# EAGLE board CT_schematic (EAGLE 7.6.0)

Size 100 x 80 mm. Coordinates in mm from the lower left corner, seen from the top.
Outline: 0,0 100,0 100,80 0,80 0,0
Copper layers (1*16): Top 0.035mm / dielectric 1.5mm / Bottom 0.035mm
Design rules "default": minimum track width 10mil, minimum drill 24mil, track to track 8mil, track to pad 8mil, pad to pad 8mil, via to via 8mil, smd to smd 8mil, copper to edge 40mil, drill to drill 8mil, minimum pad ring 10mil, minimum via ring 8mil, stop-mask expansion 4mil, vias tented up to drill 0mil, thermal gap 10mil

## Footprints (pad centres in the part's own frame; a part is rotated, then mirrored left to right if it is on the bottom)
C0603 = smd 0.8 x 0.8: 1 -0.762,0; 2 0.762,0
C0402 = smd 0.5 x 0.5: 1 -0.508,0; 2 0.508,0
C0805 = smd 1.2 x 1.3: 1 -1.016,0; 2 1.016,0
C1206 = smd 1.3 x 1.6: 1 -1.524,0; 2 1.524,0
2220 = smd 1.85 x 5.5: 1 -2.55,0; 2 2.55,0
R0603 = smd 0.8 x 0.8: 1 -0.762,0; 2 0.762,0
EXV-9H = smd 3.505 x 1.676: 1 -2.857,0; 2 2.857,0
L0603 = smd 0.8 x 0.8: 1 -0.762,0; 2 0.762,0
DR1040 = smd 1.6 x 3.2: 1 -4.458,0; 2 4.458,0
PJ-037B_PACKAGE = drill 3.7 square: 1 12,0 | drill 3.2 square: 2 6,0
LQFP176 = smd 0.3 x 1.2: 1 -10.75,-12.75; 2 -10.25,-12.75; 3 -9.75,-12.75; 4 -9.25,-12.75; 5 -8.75,-12.75; 6 -8.25,-12.75; 7 -7.75,-12.75; 8 -7.25,-12.75; 9 -6.75,-12.75; 10 -6.25,-12.75; 11 -5.75,-12.75; 12 -5.25,-12.75; 13 -4.75,-12.75; 14 -4.25,-12.75; 15 -3.75,-12.75; 16 -3.25,-12.75; 17 -2.75,-12.75; 18 -2.25,-12.75; 19 -1.75,-12.75; 20 -1.25,-12.75; 21 -0.75,-12.75; 22 -0.25,-12.75; 23 0.25,-12.75; 24 0.75,-12.75; 25 1.25,-12.75; 26 1.75,-12.75; 27 2.25,-12.75; 28 2.75,-12.75; 29 3.25,-12.75; 30 3.75,-12.75; 31 4.25,-12.75; 32 4.75,-12.75; 33 5.25,-12.75; 34 5.75,-12.75; 35 6.25,-12.75; 36 6.75,-12.75; 37 7.25,-12.75; 38 7.75,-12.75; 39 8.25,-12.75; 40 8.75,-12.75; 41 9.25,-12.75; 42 9.75,-12.75; 43 10.25,-12.75; 44 10.75,-12.75; 89 10.75,12.75; 90 10.25,12.75; 91 9.75,12.75; 92 9.25,12.75; 93 8.75,12.75; 94 8.25,12.75; 95 7.75,12.75; 96 7.25,12.75; 97 6.75,12.75; 98 6.25,12.75; 99 5.75,12.75; 100 5.25,12.75; 101 4.75,12.75; 102 4.25,12.75; 103 3.75,12.75; 104 3.25,12.75; 105 2.75,12.75; 106 2.25,12.75; 107 1.75,12.75; 108 1.25,12.75; 109 0.75,12.75; 110 0.25,12.75; 111 -0.25,12.75; 112 -0.75,12.75; 113 -1.25,12.75; 114 -1.75,12.75; 115 -2.25,12.75; 116 -2.75,12.75; 117 -3.25,12.75; 118 -3.75,12.75; 119 -4.25,12.75; 120 -4.75,12.75; 121 -5.25,12.75; 122 -5.75,12.75; 123 -6.25,12.75; 124 -6.75,12.75; 125 -7.25,12.75; 126 -7.75,12.75; 127 -8.25,12.75; 128 -8.75,12.75; 129 -9.25,12.75; 130 -9.75,12.75; 131 -10.25,12.75; 132 -10.75,12.75 | smd 1.2 x 0.3: 45 12.75,-10.75; 46 12.75,-10.25; 47 12.75,-9.75; 48 12.75,-9.25; 49 12.75,-8.75; 50 12.75,-8.25; 51 12.75,-7.75; 52 12.75,-7.25; 53 12.75,-6.75; 54 12.75,-6.25; 55 12.75,-5.75; 56 12.75,-5.25; 57 12.75,-4.75; 58 12.75,-4.25; 59 12.75,-3.75; 60 12.75,-3.25; 61 12.75,-2.75; 62 12.75,-2.25; 63 12.75,-1.75; 64 12.75,-1.25; 65 12.75,-0.75; 66 12.75,-0.25; 67 12.75,0.25; 68 12.75,0.75; 69 12.75,1.25; 70 12.75,1.75; 71 12.75,2.25; 72 12.75,2.75; 73 12.75,3.25; 74 12.75,3.75; 75 12.75,4.25; 76 12.75,4.75; 77 12.75,5.25; 78 12.75,5.75; 79 12.75,6.25; 80 12.75,6.75; 81 12.75,7.25; 82 12.75,7.75; 83 12.75,8.25; 84 12.75,8.75; 85 12.75,9.25; 86 12.75,9.75; 87 12.75,10.25; 88 12.75,10.75; 133 -12.75,10.75; 134 -12.75,10.25; 135 -12.75,9.75; 136 -12.75,9.25; 137 -12.75,8.75; 138 -12.75,8.25; 139 -12.75,7.75; 140 -12.75,7.25; 141 -12.75,6.75; 142 -12.75,6.25; 143 -12.75,5.75; 144 -12.75,5.25; 145 -12.75,4.75; 146 -12.75,4.25; 147 -12.75,3.75; 148 -12.75,3.25; 149 -12.75,2.75; 150 -12.75,2.25; 151 -12.75,1.75; 152 -12.75,1.25; 153 -12.75,0.75; 154 -12.75,0.25; 155 -12.75,-0.25; 156 -12.75,-0.75; 157 -12.75,-1.25; 158 -12.75,-1.75; 159 -12.75,-2.25; 160 -12.75,-2.75; 161 -12.75,-3.25; 162 -12.75,-3.75; 163 -12.75,-4.25; 164 -12.75,-4.75; 165 -12.75,-5.25; 166 -12.75,-5.75; 167 -12.75,-6.25; 168 -12.75,-6.75; 169 -12.75,-7.25; 170 -12.75,-7.75; 171 -12.75,-8.25; 172 -12.75,-8.75; 173 -12.75,-9.25; 174 -12.75,-9.75; 175 -12.75,-10.25; 176 -12.75,-10.75
SSOP-28 = smd 1.5 x 0.4: 1 -3.625,4.225; 2 -3.625,3.575; 3 -3.625,2.925; 4 -3.625,2.275; 5 -3.625,1.625; 6 -3.625,0.975; 7 -3.625,0.325; 8 -3.625,-0.325; 9 -3.625,-0.975; 10 -3.625,-1.625; 11 -3.625,-2.275; 12 -3.625,-2.925; 13 -3.625,-3.575; 14 -3.625,-4.225; 15 3.625,-4.225; 16 3.625,-3.575; 17 3.625,-2.925; 18 3.625,-2.275; 19 3.625,-1.625; 20 3.625,-0.975; 21 3.625,-0.325; 22 3.625,0.325; 23 3.625,0.975; 24 3.625,1.625; 25 3.625,2.275; 26 3.625,2.925; 27 3.625,3.575; 28 3.625,4.225
FCI_10118193-0001LF = smd 0.4 x 1.35: 1 -1.3,2.675; 2 -0.65,2.675; 3 0,2.675; 4 0.65,2.675; 5 1.3,2.675 | smd 1.6 x 1.4: 6 -3.2,2.45; 7 3.2,2.45 | smd 1.9 x 1.9: 8 -1.2,0; 9 1.2,0 | hole 0.5: -3.3,0; 3.3,0
SAMTEC_FTSH-105-01-L-DV-K = smd 0.762 x 2.794: 1 -2.54,-2.032; 2 -2.54,2.032; 3 -1.27,-2.032; 4 -1.27,2.032; 5 0,-2.032; 6 0,2.032; 7 1.27,-2.032; 8 1.27,2.032; 9 2.54,-2.032; 10 2.54,2.032
SOIC-8 = smd 1.6 x 0.6: 1 -2.7,1.905 | smd 1.55 x 0.6: 2 -2.7,0.635; 3 -2.7,-0.635; 4 -2.7,-1.905; 5 2.7,-1.905; 6 2.7,-0.635; 7 2.7,0.635; 8 2.7,1.905
182-009-MALE = drill 1.194 pad 1.524 octagon: 1 -5.537,10.923; 2 -2.769,10.923; 3 0,10.923; 4 2.769,10.923; 5 5.537,10.923; 6 -4.153,8.08; 7 -1.384,8.08; 8 1.384,8.08; 9 4.153,8.08 | hole 3.048: -12.446,9.501; 12.446,9.501
WFDN-8 = smd 0.48 x 0.7: 1 0,0; 2 1.27,0; 3 2.54,0; 4 3.81,0; 5 3.81,4.45; 6 2.54,4.45; 7 1.27,4.45; 8 0,4.45 | smd 4 x 3: 9 1.89,2.25
TH58NVG3S0HBAI4 = smd 0.46 x 0.46: A1 -5.6,2.4; A2 -5.6,1.6; A9 -5.6,-5.6; A10 -5.6,-6.4; B1 -4.8,2.4; B9 -4.8,-5.6; B10 -4.8,-6.4; C3 -4,0.8; C4 -3.2,0.8; C5 -2.4,0.8; C6 -1.6,0.8; C7 -0.8,0.8; C8 0,0.8; D3 -4,0; D4 -3.2,0; D5 -2.4,0; D6 -1.6,0; D7 -0.8,0; D8 0,0; E3 -4,-0.8; E4 -3.2,-0.8; E5 -2.4,-0.8; E6 -1.6,-0.8; E7 -0.8,-0.8; E8 0,-0.8; F3 -4,-1.6; F4 -3.2,-1.6; F5 -2.4,-1.6; F6 -1.6,-1.6; F7 -0.8,-1.6; F8 0,-1.6; G3 -4,-2.4; G4 -3.2,-2.4; G5 -2.4,-2.4; G6 -1.6,-2.4; G7 -0.8,-2.4; G8 0,-2.4; H3 -4,-3.2; H4 -3.2,-3.2; H5 -2.4,-3.2; H6 -1.6,-3.2; H7 -0.8,-3.2; H8 0,-3.2; J3 -4,-4; J4 -3.2,-4; J5 -2.4,-4; J6 -1.6,-4; J7 -0.8,-4; J8 0,-4; K3 -4,-4.8; K4 -3.2,-4.8; K5 -2.4,-4.8; K6 -1.6,-4.8; K7 -0.8,-4.8; K8 0,-4.8; L1 0.8,2.4; L2 0.8,1.6; L9 0.8,-5.6; L10 0.8,-6.4; M1 1.6,2.4; M2 1.6,1.6; M9 1.6,-5.6; M10 1.6,-6.4
ABLS-12.000MHZ-B4-T = smd 5.6 x 2.8: 1 0,0; 2 9.5,0
ASEK = smd 1.4 x 1: 1 -1.1,-0.8; 2 1.1,-0.8; 3 1.1,0.8; 4 -1.1,0.8
ASFL1 = smd 1.7 x 1.5: 1 -1.27,-1.1; 2 1.27,-1.1; 3 1.27,1.1; 4 -1.27,1.1
WSON-8 = smd 0.3 x 0.6: 1 -0.75,0; 2 0.05,0; 3 0.85,0; 4 1.65,0; 5 1.65,3.8; 6 0.85,3.8; 7 0.05,3.8; 8 -0.75,3.8 | smd 3 x 2.6: PAD 0.45,1.9
QFN-16_EP = smd 0.805 x 0.3: 1 -1.452,0.75; 2 -1.452,0.25; 3 -1.452,-0.25; 4 -1.452,-0.75; 9 1.452,-0.75; 10 1.452,-0.25; 11 1.452,0.25; 12 1.452,0.75 | smd 0.3 x 0.805: 5 -0.75,-1.452; 6 -0.25,-1.452; 7 0.25,-1.452; 8 0.75,-1.452; 13 0.75,1.452; 14 0.25,1.452; 15 -0.25,1.452; 16 -0.75,1.452 | smd 1.55 x 1.55: 17 0,0
QFN-38_UHF = smd 0.75 x 0.3: 1 -2.4,2.75; 2 -2.4,2.25; 3 -2.4,1.75; 4 -2.4,1.25; 6 -2.4,0.25; 7 -2.4,-0.25; 8 -2.4,-0.75; 9 -2.4,-1.25; 10 -2.4,-1.75; 11 -2.4,-2.25; 12 -2.4,-2.75; 20 2.4,-2.75; 21 2.4,-2.25; 22 2.4,-1.75; 23 2.4,-1.25; 24 2.4,-0.75; 25 2.4,-0.25; 26 2.4,0.25; 27 2.4,0.75; 28 2.4,1.25; 29 2.4,1.75; 30 2.4,2.25; 31 2.4,2.75 | smd 0.758 x 0.3: 5 -2.4,0.75 | smd 0.3 x 0.75: 13 -1.5,-3.4; 14 -1,-3.4; 15 -0.5,-3.4; 16 0,-3.4; 17 0.5,-3.4; 18 1,-3.4; 19 1.5,-3.4; 32 1.5,3.4; 33 1,3.4; 34 0.5,3.4; 35 0,3.4; 36 -0.5,3.4; 37 -1,3.4; 38 -1.5,3.4 | smd 3.2 x 5.2: 39 0,0
IRF8306MTRPBF = smd 0.9 x 1.85: 1 0,0; 2 0,-2.35; 6 6.4,0; 7 6.4,-2.35 | smd 0.75 x 0.75: 3 1.75,-1.175 | smd 1.45 x 0.87: 4 3.5,-0.565; 5 3.5,-1.785
SW_4-1437565-2 = smd 1.4 x 2.1: 1 -2.23,4.55; 2 -2.23,-4.55; 3 2.23,4.55; 4 2.23,-4.55
LGM67K-G1J2-24-Z = smd 0.8 x 1.4: A -2,0; C 0,0
NC7SZ125M5X = smd 1.3 x 0.7: 1 -1.3,0.95; 2 -1.3,0; 3 -1.3,-0.95; 4 1.3,-0.95; 5 1.3,0.95

## Placement (x,y rotation side)
C1  1e-06  [C0603]  -82.55,85.09 0 top  (outside the outline)
C2  1e-07  [C0603]  -86.36,85.09 0 top  (outside the outline)
C3  1e-07  [C0603]  -90.17,85.09 0 top  (outside the outline)
C4  1e-07  [C0603]  -93.98,85.09 0 top  (outside the outline)
C5  1e-07  [C0603]  -15.24,90.17 0 top  (outside the outline)
C6  1e-07  [C0603]  -19.05,90.17 0 top  (outside the outline)
C7  1e-07  [C0603]  -22.86,90.17 0 top  (outside the outline)
C8  1e-07  [C0603]  -26.67,90.17 0 top  (outside the outline)
C9  1e-07  [C0603]  -30.48,90.17 0 top  (outside the outline)
C10  1e-07  [C0603]  -34.29,90.17 0 top  (outside the outline)
C11  1e-07  [C0603]  -38.1,90.17 0 top  (outside the outline)
C12  1e-07  [C0603]  -41.91,90.17 0 top  (outside the outline)
C13  1e-07  [C0603]  -45.72,90.17 0 top  (outside the outline)
C14  1e-07  [C0603]  -49.53,90.17 0 top  (outside the outline)
C15  1e-07  [C0603]  -53.34,90.17 0 top  (outside the outline)
C16  1e-07  [C0603]  -57.15,90.17 0 top  (outside the outline)
C17  1e-07  [C0603]  -60.96,90.17 0 top  (outside the outline)
C18  4.7e-06  [C0603]  -74.93,85.09 0 top  (outside the outline)
C19  1e-08  [C0603]  -64.77,90.17 0 top  (outside the outline)
C20  1e-06  [C0603]  -68.58,90.17 0 top  (outside the outline)
C21  1e-07  [C0603]  -72.39,90.17 0 top  (outside the outline)
C22  1e-07  [C0603]  -76.2,90.17 0 top  (outside the outline)
C23  1e-07  [C0603]  -80.01,90.17 0 top  (outside the outline)
C24  1e-07  [C0402]  -49.53,95.25 0 top  (outside the outline)
C25  4.7e-06  [C0805]  -34.29,73.66 0 top  (outside the outline)
C26  1e-07  [C0402]  -53.34,95.25 0 top  (outside the outline)
C27  1e-07  [C0402]  -57.15,95.25 0 top  (outside the outline)
C28  1e-07  [C0402]  -60.96,95.25 0 top  (outside the outline)
C29  1e-07  [C0402]  -64.77,95.25 0 top  (outside the outline)
C30  1e-07  [C0402]  -68.58,95.25 0 top  (outside the outline)
C31  1e-05  [C0805]  -39.37,73.66 0 top  (outside the outline)
C32  1e-07  [C0402]  -72.39,95.25 0 top  (outside the outline)
C33  1e-07  [C0402]  -76.2,95.25 0 top  (outside the outline)
C34  1e-08  [C0402]  -80.01,95.25 0 top  (outside the outline)
C35  1e-08  [C0402]  -83.82,95.25 0 top  (outside the outline)
C36  1e-08  [C0402]  -87.63,95.25 0 top  (outside the outline)
C37  1e-05  [C1206]  -90.17,66.04 0 top  (outside the outline)
C38  1e-05  [C0805]  -44.45,73.66 0 top  (outside the outline)
C39  1e-05  [C0805]  -49.53,73.66 0 top  (outside the outline)
C40  1e-06  [C0603]  -83.82,90.17 0 top  (outside the outline)
C41  1e-07  [C0402]  -91.44,95.25 0 top  (outside the outline)
C42  6.8e-05  [2220]  -92.71,46.99 0 top  (outside the outline)
C43  1e-08  [C0402]  -95.25,95.25 0 top  (outside the outline)
C44  1e-05  [C1206]  -16.51,73.66 0 top  (outside the outline)
C45  1e-05  [C0805]  -54.61,73.66 0 top  (outside the outline)
C46  1e-07  [C0402]  -15.24,100.33 0 top  (outside the outline)
C47  2.2e-06  [C0603]  -78.74,85.09 0 top  (outside the outline)
C48  2.45e-08  [R0603]  -25.4,80.01 0 top  (outside the outline)
C49  2.8258362168397e-09  [R0603]  -64.77,73.66 0 top  (outside the outline)
C50  7.105e-09  [R0603]  -69.85,73.66 0 top  (outside the outline)
C51  0.0001  [EXV-9H]  -38.1,67.31 0 top  (outside the outline)
C52  0.0001  [EXV-9H]  -49.53,67.31 0 top  (outside the outline)
C53  1e-08  [C0402]  -19.05,100.33 0 top  (outside the outline)
C54  1e-08  [C0402]  -22.86,100.33 0 top  (outside the outline)
F1  240.0  [L0603]  -87.63,90.17 0 top  (outside the outline)
I1  5.2e-06  [DR1040]  -19.05,48.26 0 top  (outside the outline)
J1  PJ-037B  [PJ-037B_PACKAGE]  -74.93,34.29 0 top  (outside the outline)
R2  1000.0  [R0603]  -91.44,90.17 0 top  (outside the outline)
R4  4700.0  [R0603]  -95.25,90.17 0 top  (outside the outline)
R5  10000.0  [R0603]  -30.48,80.01 0 top  (outside the outline)
R6  10000.0  [R0603]  -35.56,80.01 0 top  (outside the outline)
R7  10000.0  [R0603]  -40.64,80.01 0 top  (outside the outline)
R8  4700.0  [R0603]  -15.24,95.25 0 top  (outside the outline)
R9  10000.0  [R0603]  -45.72,80.01 0 top  (outside the outline)
R10  10000.0  [R0603]  -50.8,80.01 0 top  (outside the outline)
R11  10000.0  [R0603]  -55.88,80.01 0 top  (outside the outline)
R12  10000.0  [R0603]  -60.96,80.01 0 top  (outside the outline)
R13  10000.0  [R0603]  -66.04,80.01 0 top  (outside the outline)
R14  5.0  [R0603]  -19.05,95.25 0 top  (outside the outline)
R15  120.0  [R0603]  -22.86,95.25 0 top  (outside the outline)
R16  470000.0  [R0603]  -74.93,73.66 0 top  (outside the outline)
R17  100000.0  [R0603]  -80.01,73.66 0 top  (outside the outline)
R18  100000.0  [R0603]  -85.09,73.66 0 top  (outside the outline)
R19  100000.0  [R0603]  -90.17,73.66 0 top  (outside the outline)
R20  10000.0  [R0603]  -71.12,80.01 0 top  (outside the outline)
R21  10000.0  [R0603]  -76.2,80.01 0 top  (outside the outline)
R22  10000.0  [R0603]  -81.28,80.01 0 top  (outside the outline)
R23  10000.0  [R0603]  -86.36,80.01 0 top  (outside the outline)
R24  10000.0  [R0603]  -91.44,80.01 0 top  (outside the outline)
R25  100000.0  [R0603]  -95.25,73.66 0 top  (outside the outline)
R26  200.0  [R0603]  -26.67,95.25 0 top  (outside the outline)
R27  1000.0  [R0603]  -30.48,95.25 0 top  (outside the outline)
R28  20000.0  [R0603]  -15.24,85.09 0 top  (outside the outline)
R29  91000.0  [R0603]  -20.32,85.09 0 top  (outside the outline)
R30  300000.0  [R0603]  -15.24,80.01 0 top  (outside the outline)
R31  100000.0  [R0603]  -20.32,80.01 0 top  (outside the outline)
R32  200.0  [R0603]  -34.29,95.25 0 top  (outside the outline)
R33  1000.0  [R0603]  -38.1,95.25 0 top  (outside the outline)
R34  10000.0  [R0603]  -25.4,85.09 0 top  (outside the outline)
R35  75000.0  [R0603]  -30.48,85.09 0 top  (outside the outline)
R36  10000.0  [R0603]  -35.56,85.09 0 top  (outside the outline)
R37  10000.0  [R0603]  -40.64,85.09 0 top  (outside the outline)
R38  95300.0  [R0603]  -45.72,85.09 0 top  (outside the outline)
R39  95300.0  [R0603]  -50.8,85.09 0 top  (outside the outline)
R40  10000.0  [R0603]  -55.88,85.09 0 top  (outside the outline)
R41  10000.0  [R0603]  -60.96,85.09 0 top  (outside the outline)
R42  10000.0  [R0603]  -66.04,85.09 0 top  (outside the outline)
R43  75000.0  [R0603]  -71.12,85.09 0 top  (outside the outline)
U1  STM32F756IGT6  [LQFP176]  -26.67,13.97 0 top  (outside the outline)
U2  FT232RL-REEL  [SSOP-28]  -87.63,7.62 0 top  (outside the outline)
U3  10118193-0001LF  [FCI_10118193-0001LF]  -76.2,57.15 0 top  (outside the outline)
U4  FTSH-105-01-L-DV-K  [SAMTEC_FTSH-105-01-L-DV-K]  -35.56,35.56 0 top  (outside the outline)
U5  SN65HVD230D  [SOIC-8]  -54.61,46.99 0 top  (outside the outline)
U6  182-009-113R531  [182-009-MALE]  -63.5,6.35 0 top  (outside the outline)
U7  SST26VF064B-104I/MF  [WFDN-8]  -43.18,45.72 0 top  (outside the outline)
U8  TH58NVG3S0HBAI4  [TH58NVG3S0HBAI4]  -53.34,36.83 0 top  (outside the outline)
U9  ABLS-12.000MHZ-B4-T  [ABLS-12.000MHZ-B4-T]  -71.12,67.31 0 top  (outside the outline)
U10  ASEK-32.768KHz-ECST  [ASEK]  -29.21,67.31 0 top  (outside the outline)
U11  ASFL1-25MHZ-NCS  [ASFL1]  -67.31,58.42 0 top  (outside the outline)
U12  LP3878SDX-ADJ/NOPB  [WSON-8]  -30.48,57.15 0 top  (outside the outline)
U13  LTC3601EUD#PBF  [QFN-16_EP]  -43.18,95.25 0 top  (outside the outline)
U14  LP3878SDX-ADJ/NOPB  [WSON-8]  -50.8,57.15 0 top  (outside the outline)
U15  LTC2928CUHF#PBF  [QFN-38_UHF]  -85.09,58.42 0 top  (outside the outline)
U16  IRF8306MTRPbF  [IRF8306MTRPBF]  -72.39,48.26 0 top  (outside the outline)
U17  IRF8306MTRPbF  [IRF8306MTRPBF]  -87.63,48.26 0 top  (outside the outline)
U18  4-1437565-2  [SW_4-1437565-2]  -91.44,34.29 0 top  (outside the outline)
U19  Q65110A2395  [LGM67K-G1J2-24-Z]  -78.74,67.31 0 top  (outside the outline)
U20  nc7sz125m5x  [NC7SZ125M5X]  -21.59,73.66 0 top  (outside the outline)
U21  nc7sz125m5x  [NC7SZ125M5X]  -27.94,73.66 0 top  (outside the outline)

## Library data of the parts
C1-C54 F1 I1 J1 R2 R4-R43 U1-U21 = circuit_tree

## Nets
CLK_CRYSTAL_U2_27: U2.27 U9.1
CLK_CRYSTAL_U2_28: U2.28 U9.2
CLK_U1_9: U1.9 U10.3
CLK_U1_29: U1.29 U11.3
GND: C1.2 C2.2 C3.2 C4.2 C5.2 C6.2 C7.2 C8.2 C9.2 C10.2 C11.2 C12.2 C13.2 C14.2 C15.2 C16.2 C17.2 C18.2 C19.2 C20.2 C21.2 C22.2 C23.2 C24.2 C25.2 C26.2 C27.2 C28.2 C29.2 C30.2 C31.2 C32.2 C33.2 C34.2 C35.2 C36.2 C37.2 C38.2 C39.2 C40.2 C42.1 C42.2 C43.2 C44.2 C45.2 C46.2 C47.2 C48.2 C49.2 C50.2 C51.2 C52.2 C53.2 C54.2 J1.2 R2.2 R5.2 R10.2 R14.2 R16.2 R27.2 R28.2 R30.2 R33.2 R35.2 R38.2 R39.2 R40.2 R41.2 R42.2 U1.14 U1.22 U1.37 U1.61 U1.71 U1.90 U1.102 U1.113 U1.126 U1.135 U1.148 U1.158 U2.7 U2.18 U2.21 U2.25 U2.26 U3.5 U3.6 U3.7 U3.8 U3.9 U4.3 U4.5 U5.2 U6.5 U7.4 U7.9 U8.C5 U8.K3 U8.K8 U10.2 U11.2 U12.3 U12.PAD U13.1 U13.9 U13.17 U14.3 U14.PAD U15.8 U15.9 U15.10 U15.12 U15.13 U15.24 U15.25 U15.30 U15.32 U15.39 U19.C U20.2 U20.3 U21.1 U21.3
NET_U1_31: R4.1 U1.31 U21.4
NET_U1_39: C19.1 C20.1 F1.1 U1.38 U1.39
NET_U1_48: R7.1 U1.48
NET_U1_125: C23.1 U1.125
NET_U1_166: R5.1 U1.166
NET_U1_171: R6.1 U1.171
NET_U1_175: U19.A
NET_U1_176: U18.3 U18.4
NET_U2_14: R9.1 U2.14
NET_U2_17: C26.1 U2.17
NET_U2_19: R10.1 U2.19
NET_U3_1: R8.1 U3.1
NET_U3_2: U2.16 U3.2
NET_U3_3: U2.15 U3.3
NET_U3_19: R8.2
NET_U4_9: R14.1 U4.9
NET_U5_6: R15.2 U5.6
NET_U5_8: R16.1 U5.8
NET_U6_2: R15.2 U5.6 U6.2
NET_U6_3: R15.1 U5.7 U6.3
NET_U8_C3: R23.1 U8.C3
NET_U12_1: C36.1 U12.1
NET_U12_6: R26.2 R27.1 U12.6
NET_U12_8: R25.1 U12.8
NET_U13_3: C41.2 I1.1 U13.3 U13.4
NET_U13_6: C41.1 U13.6
NET_U13_7: C40.1 U13.7 U13.12
NET_U13_10: R30.1 U13.10
NET_U13_11: R28.1 R29.1 U13.11
NET_U13_14: U13.14
NET_U13_ATNET_3: I1.2 R29.2
NET_U14_1: C43.1 U14.1
NET_U14_6: R32.2 R33.1 U14.6
NET_U14_8: R31.1 U14.8
NET_U15_3: R41.1 U15.3
NET_U15_6: R38.1 U15.6
NET_U15_7: R39.1 U15.7
NET_U15_16: R40.1 R43.1 U15.16
NET_U15_18: R37.1 U15.18
NET_U15_19: R36.1 U15.19 U15.20
NET_U15_21: R34.1 R35.1 U15.21 U20.4 U21.2
NET_U15_22: C46.1 R34.2 R36.2 R37.2 U15.11 U15.22
NET_U15_26: C49.1 U15.26
NET_U15_27: C48.1 U15.27
NET_U15_28: C50.1 U15.28
NET_U15_38: R42.1 U15.38
NET_U16_3: U15.2 U16.3
NET_U17_3: U15.37 U17.3
NET_U18_1: R2.1 U18.1 U18.2
PROC_CAN1_RX: U1.11 U5.4
PROC_CAN1_TX: U1.123 U5.1
PROC_FMC_A16: U1.99 U8.D5
PROC_FMC_A17: U1.100 U8.C4
PROC_FMC_D0: U1.104 U8.H4
PROC_FMC_D1: U1.105 U8.J4
PROC_FMC_D2: U1.142 U8.K4
PROC_FMC_D3: U1.143 U8.K5
PROC_FMC_D4: U1.68 U8.K6
PROC_FMC_D5: U1.69 U8.J7
PROC_FMC_D6: U1.70 U8.K7
PROC_FMC_D7: U1.73 U8.J8
PROC_FMC_INT: R24.1 U1.111 U8.C8
PROC_FMC_NCE: R20.1 U1.152 U8.C6
PROC_FMC_NOE: R21.1 U1.146 U8.D4
PROC_FMC_NWE: R22.1 U1.147 U8.C7
PROC_QUADSPI_BK1_IO0: U1.26 U7.5
PROC_QUADSPI_BK1_IO1: U1.27 U7.2
PROC_QUADSPI_BK1_IO2: R18.1 U1.1 U7.3
PROC_QUADSPI_BK1_IO3: R19.1 U1.24 U7.7
PROC_QUADSPI_BK1_NCS: R17.1 U1.164 U7.1
PROC_QUADSPI_CLK: U1.58 U7.6
PROC_SYS_JTCK_SWCLK: R12.1 U1.137 U4.4
PROC_SYS_JTDO_SWO: U1.161 U4.6
PROC_SYS_JTMS_SWDIO: R13.1 U1.124 U4.2
PROC_UART4_CTS: U2.3
PROC_UART4_RTS: U2.11
PROC_UART4_RX: U2.1
PROC_UART4_TX: U2.5
RST_OUT_U4_JTAG_RST_B: R11.1 U4.10 U20.1
VCC_9V5: C47.1 C51.1 C52.1 J1.1 R43.2 U15.23 U16.1 U16.2 U16.6 U16.7 U17.1 U17.2 U17.6 U17.7
VCC_S1_9V5: C37.1 C39.1 R25.2 U12.4 U13.15 U13.16 U16.4 U16.5
VCC_S2_9V5: C44.1 R31.2 U14.4 U17.4 U17.5
VCC_TIER1_1V2: C22.1 C38.1 R26.1 U1.81 U12.5
VCC_TIER1_3V3: C1.1 C2.1 C3.1 C4.1 C5.1 C6.1 C7.1 C8.1 C9.1 C10.1 C11.1 C12.1 C13.1 C14.1 C15.1 C16.1 C17.1 C18.1 C21.1 C24.1 C25.1 C27.1 C28.1 C29.1 C30.1 C31.1 C32.1 C33.1 C34.1 C35.1 C42.2 C53.1 C54.1 F1.2 I1.2 R4.2 R6.2 R7.2 R9.2 R11.2 R12.2 R13.2 R17.2 R18.2 R19.2 R20.2 R21.2 R22.2 R23.2 R24.2 R29.2 U1.6 U1.15 U1.23 U1.36 U1.49 U1.62 U1.72 U1.82 U1.91 U1.103 U1.114 U1.127 U1.136 U1.149 U1.159 U1.172 U2.4 U2.20 U4.1 U5.3 U7.8 U8.H8 U8.J6 U10.4 U11.4 U13.8 U20.5 U21.5
VCC_TIER2_1V2: C45.1 R32.1 U14.5

## Tracks (layer width: path | path; a pad name or v marks a point on that pad's centre or on a via)
CLK_CRYSTAL_U2_27  (1 unrouted)
CLK_CRYSTAL_U2_28  (1 unrouted)
CLK_U1_9  (1 unrouted)
CLK_U1_29  (1 unrouted)
GND  (124 unrouted)
NET_U1_31  (2 unrouted)
NET_U1_39  (4 unrouted)
NET_U1_48  (1 unrouted)
NET_U1_125  (1 unrouted)
NET_U1_166  (1 unrouted)
NET_U1_171  (1 unrouted)
NET_U1_176  (1 unrouted)
NET_U2_14  (1 unrouted)
NET_U2_17  (1 unrouted)
NET_U2_19  (1 unrouted)
NET_U3_1  (1 unrouted)
NET_U3_2  (1 unrouted)
NET_U3_3  (1 unrouted)
NET_U4_9  (1 unrouted)
NET_U5_6  (1 unrouted)
NET_U5_8  (1 unrouted)
NET_U6_2  (2 unrouted)
NET_U6_3  (2 unrouted)
NET_U8_C3  (1 unrouted)
NET_U12_1  (1 unrouted)
NET_U12_6  (2 unrouted)
NET_U12_8  (1 unrouted)
NET_U13_3  (3 unrouted)
NET_U13_6  (1 unrouted)
NET_U13_7  (2 unrouted)
NET_U13_10  (1 unrouted)
NET_U13_11  (2 unrouted)
NET_U13_ATNET_3  (1 unrouted)
NET_U14_1  (1 unrouted)
NET_U14_6  (2 unrouted)
NET_U14_8  (1 unrouted)
NET_U15_3  (1 unrouted)
NET_U15_6  (1 unrouted)
NET_U15_7  (1 unrouted)
NET_U15_16  (2 unrouted)
NET_U15_18  (1 unrouted)
NET_U15_19  (2 unrouted)
NET_U15_21  (4 unrouted)
NET_U15_22  (5 unrouted)
NET_U15_26  (1 unrouted)
NET_U15_27  (1 unrouted)
NET_U15_28  (1 unrouted)
NET_U15_38  (1 unrouted)
NET_U16_3  (1 unrouted)
NET_U17_3  (1 unrouted)
NET_U18_1  (2 unrouted)
PROC_CAN1_RX  (1 unrouted)
PROC_CAN1_TX  (1 unrouted)
PROC_FMC_A16  (1 unrouted)
PROC_FMC_A17  (1 unrouted)
PROC_FMC_D0  (1 unrouted)
PROC_FMC_D1  (1 unrouted)
PROC_FMC_D2  (1 unrouted)
PROC_FMC_D3  (1 unrouted)
PROC_FMC_D4  (1 unrouted)
PROC_FMC_D5  (1 unrouted)
PROC_FMC_D6  (1 unrouted)
PROC_FMC_D7  (1 unrouted)
PROC_FMC_INT  (2 unrouted)
PROC_FMC_NCE  (2 unrouted)
PROC_FMC_NOE  (2 unrouted)
PROC_FMC_NWE  (2 unrouted)
PROC_QUADSPI_BK1_IO0  (1 unrouted)
PROC_QUADSPI_BK1_IO1  (1 unrouted)
PROC_QUADSPI_BK1_IO2  (2 unrouted)
PROC_QUADSPI_BK1_IO3  (2 unrouted)
PROC_QUADSPI_BK1_NCS  (2 unrouted)
PROC_QUADSPI_CLK  (1 unrouted)
PROC_SYS_JTCK_SWCLK  (2 unrouted)
PROC_SYS_JTDO_SWO  (1 unrouted)
PROC_SYS_JTMS_SWDIO  (2 unrouted)
RST_OUT_U4_JTAG_RST_B  (2 unrouted)
VCC_9V5  (13 unrouted)
VCC_S1_9V5  (7 unrouted)
VCC_S2_9V5  (4 unrouted)
VCC_TIER1_1V2  (4 unrouted)
VCC_TIER1_3V3  (78 unrouted)
VCC_TIER2_1V2  (2 unrouted)